# Altium PCB HEAD.PcbDoc
Units mm, origin at the board's own origin, x right, y up, seen from the top; angles counter-clockwise.
Board outline 62.16 x 42.39 mm, 2 copper layers (Top Layer, Bottom Layer); 51 components, 38 nets, 184 pads, 22 vias.
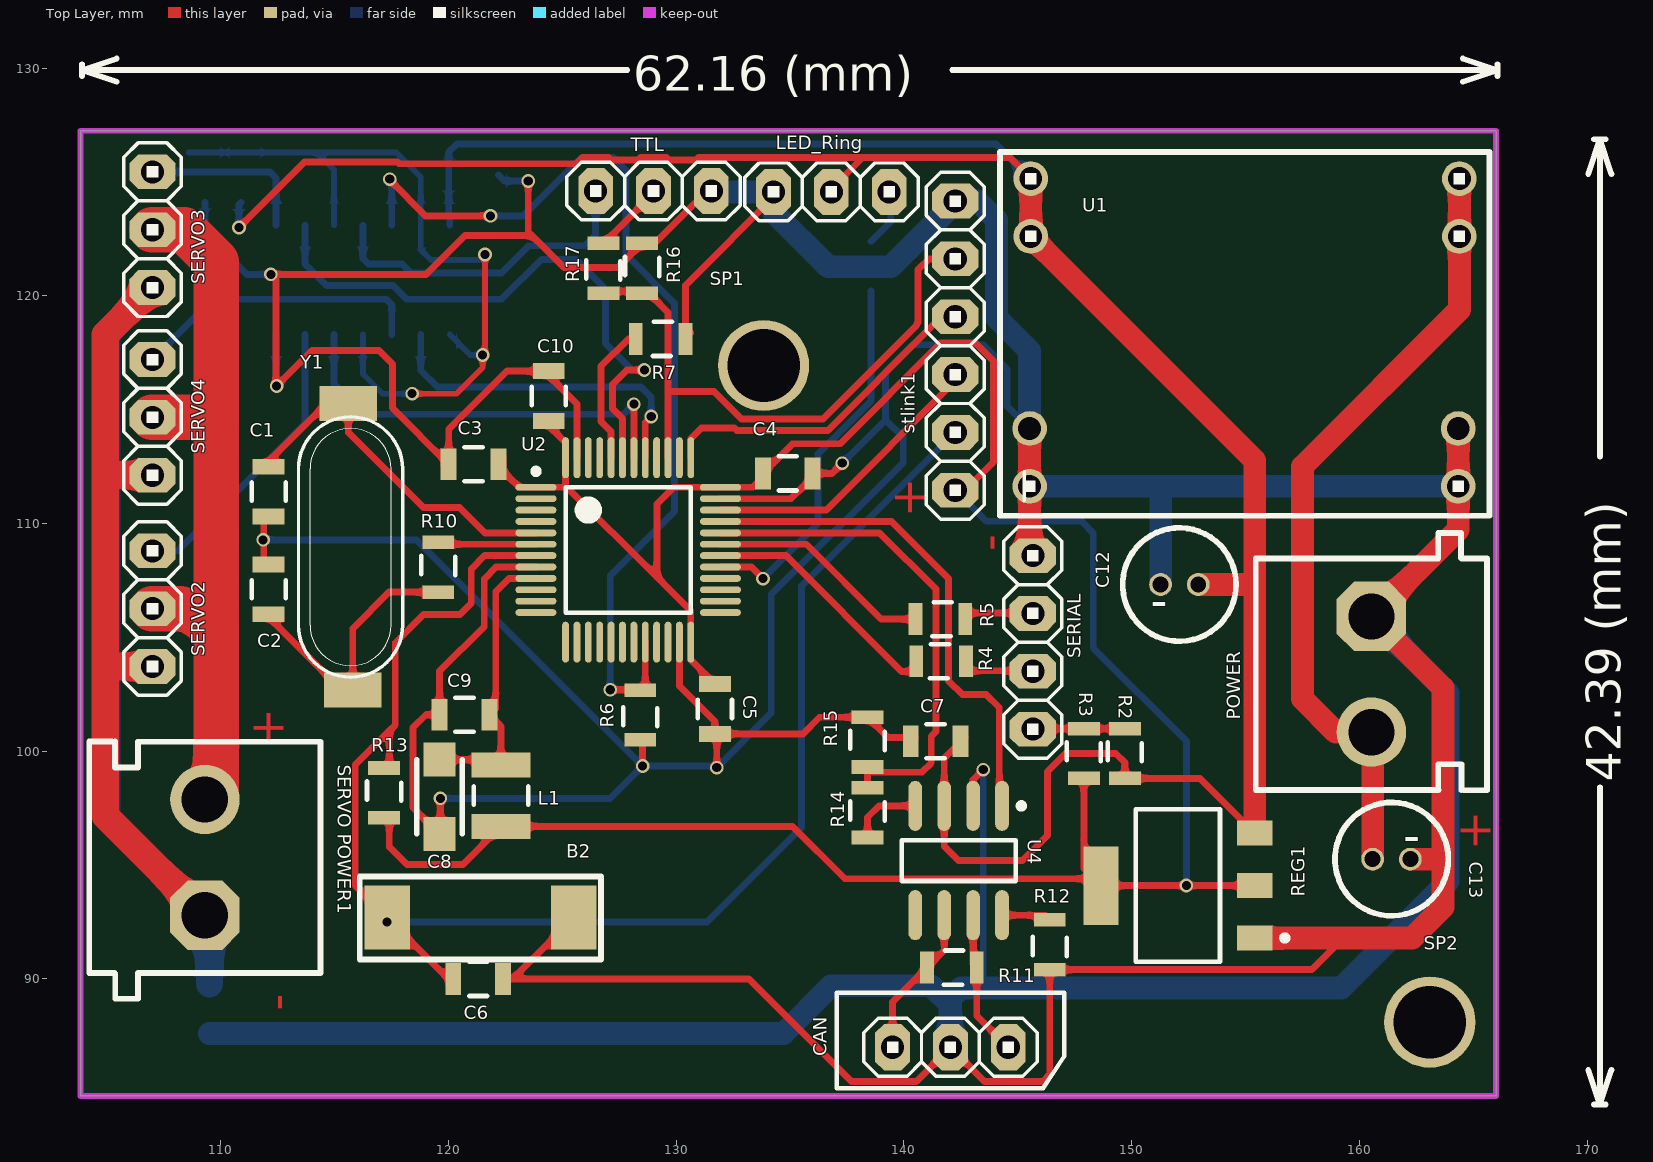
[diagram p0: Top Layer view]
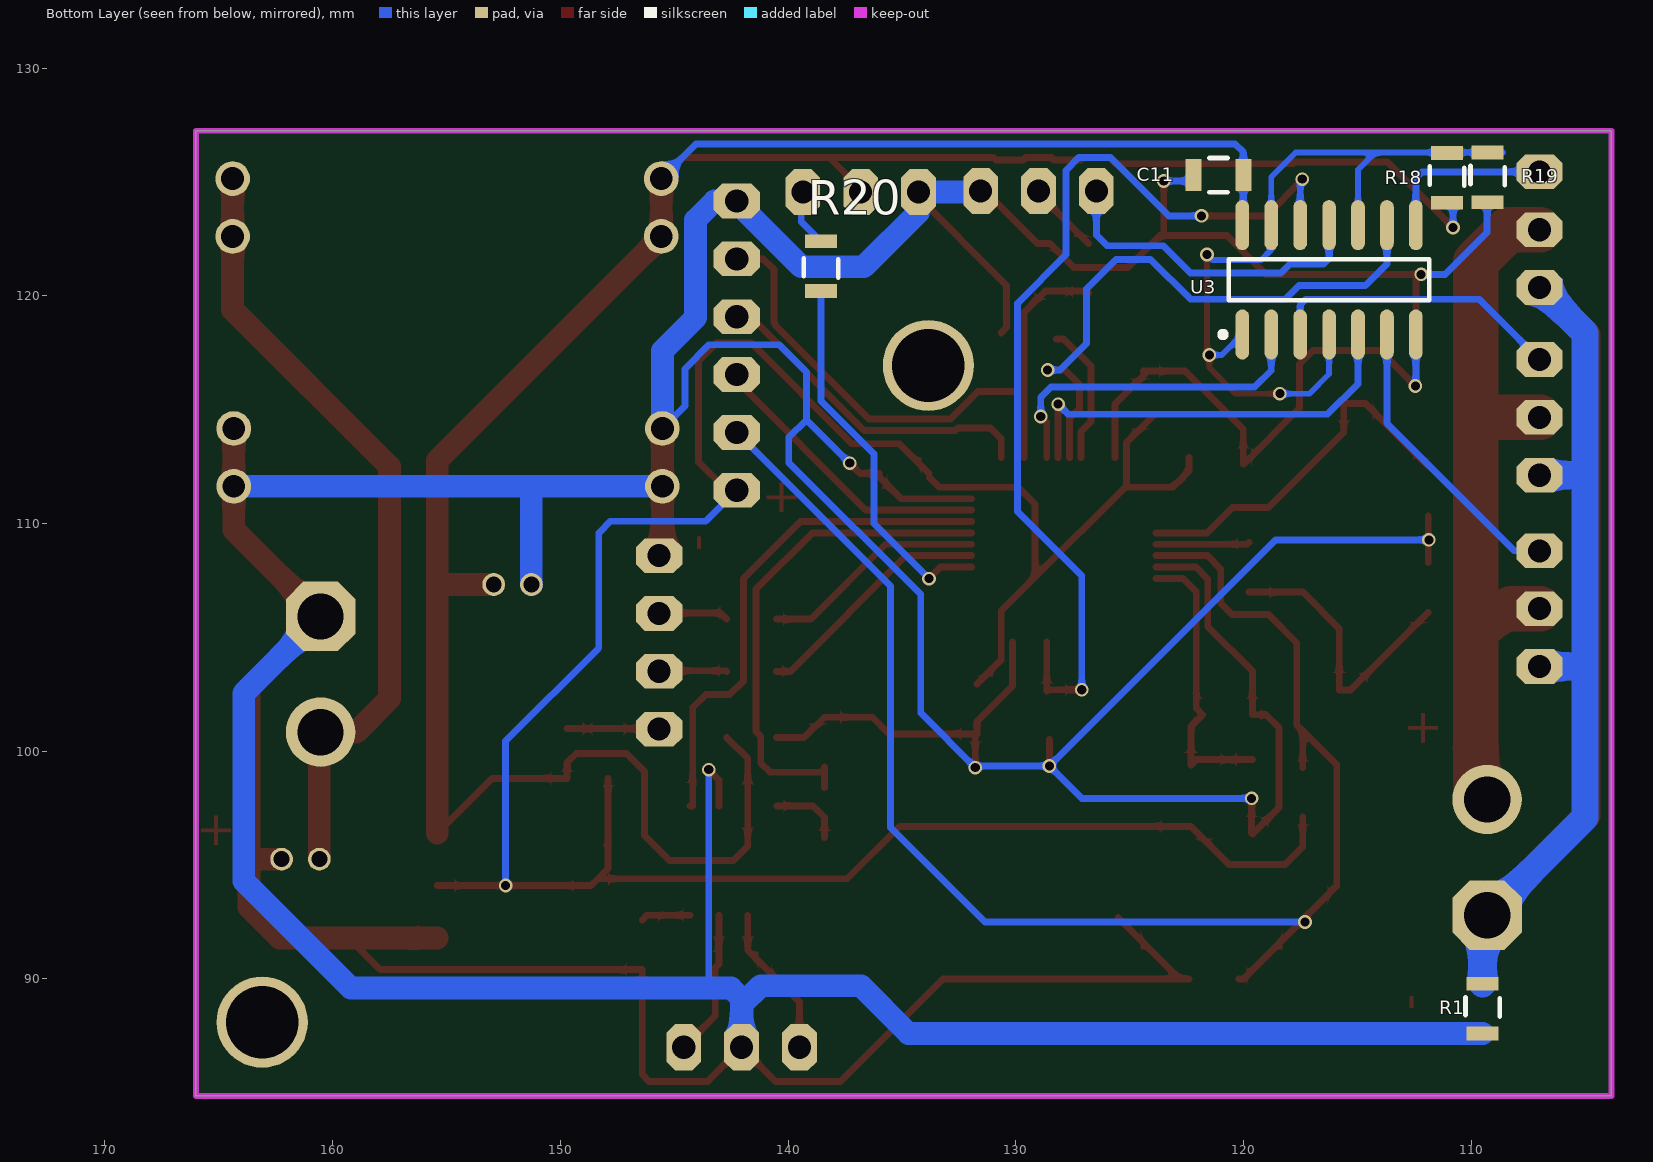
[diagram p1: Bottom Layer view, seen from below]
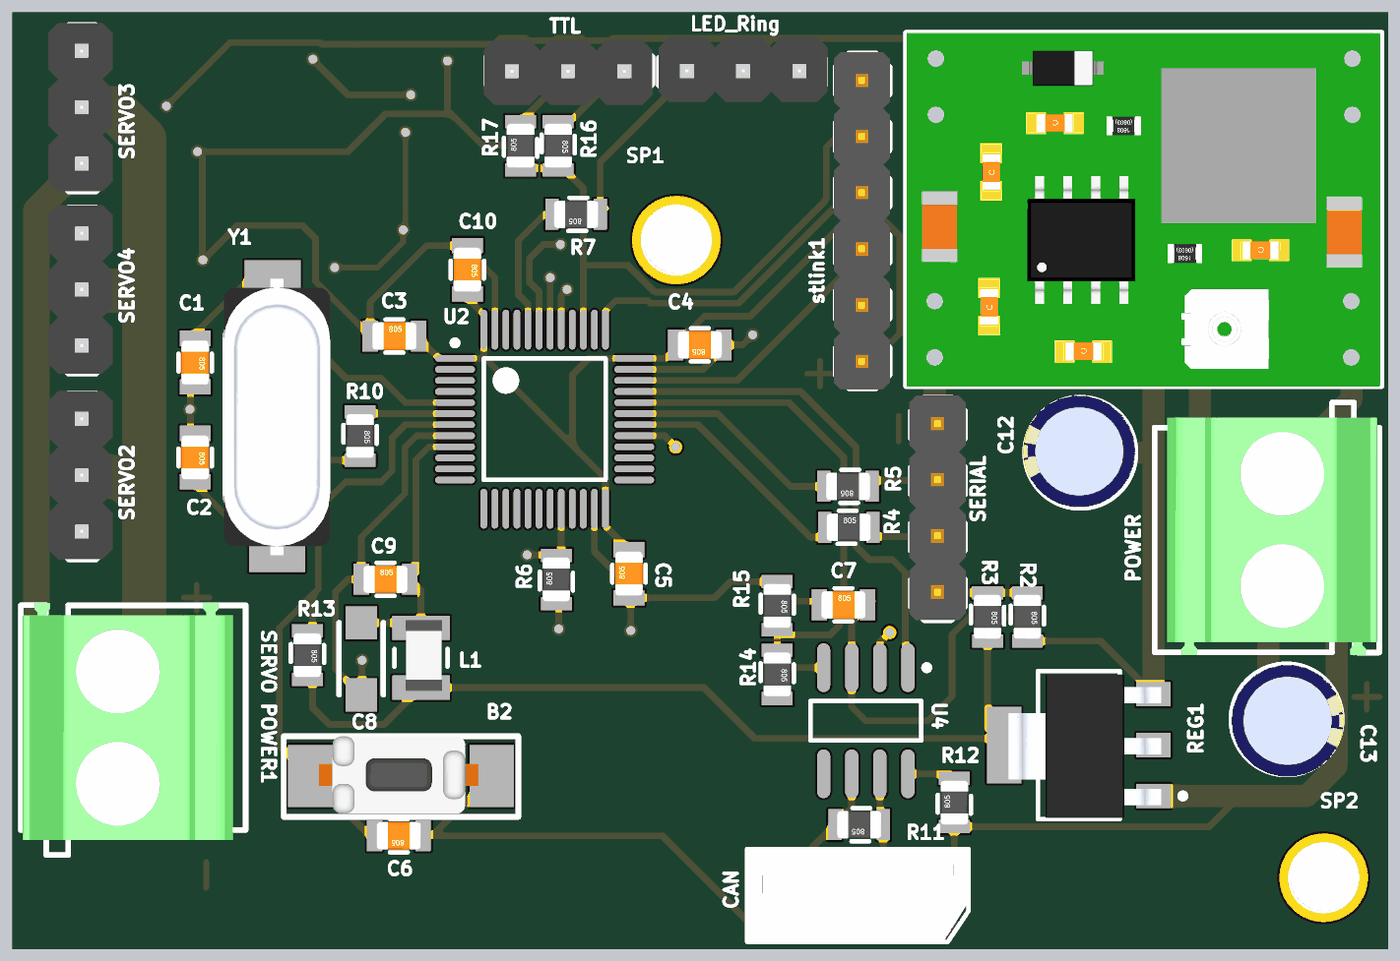
[diagram p2: 3D render of the assembled board from above, using the file's embedded part models]
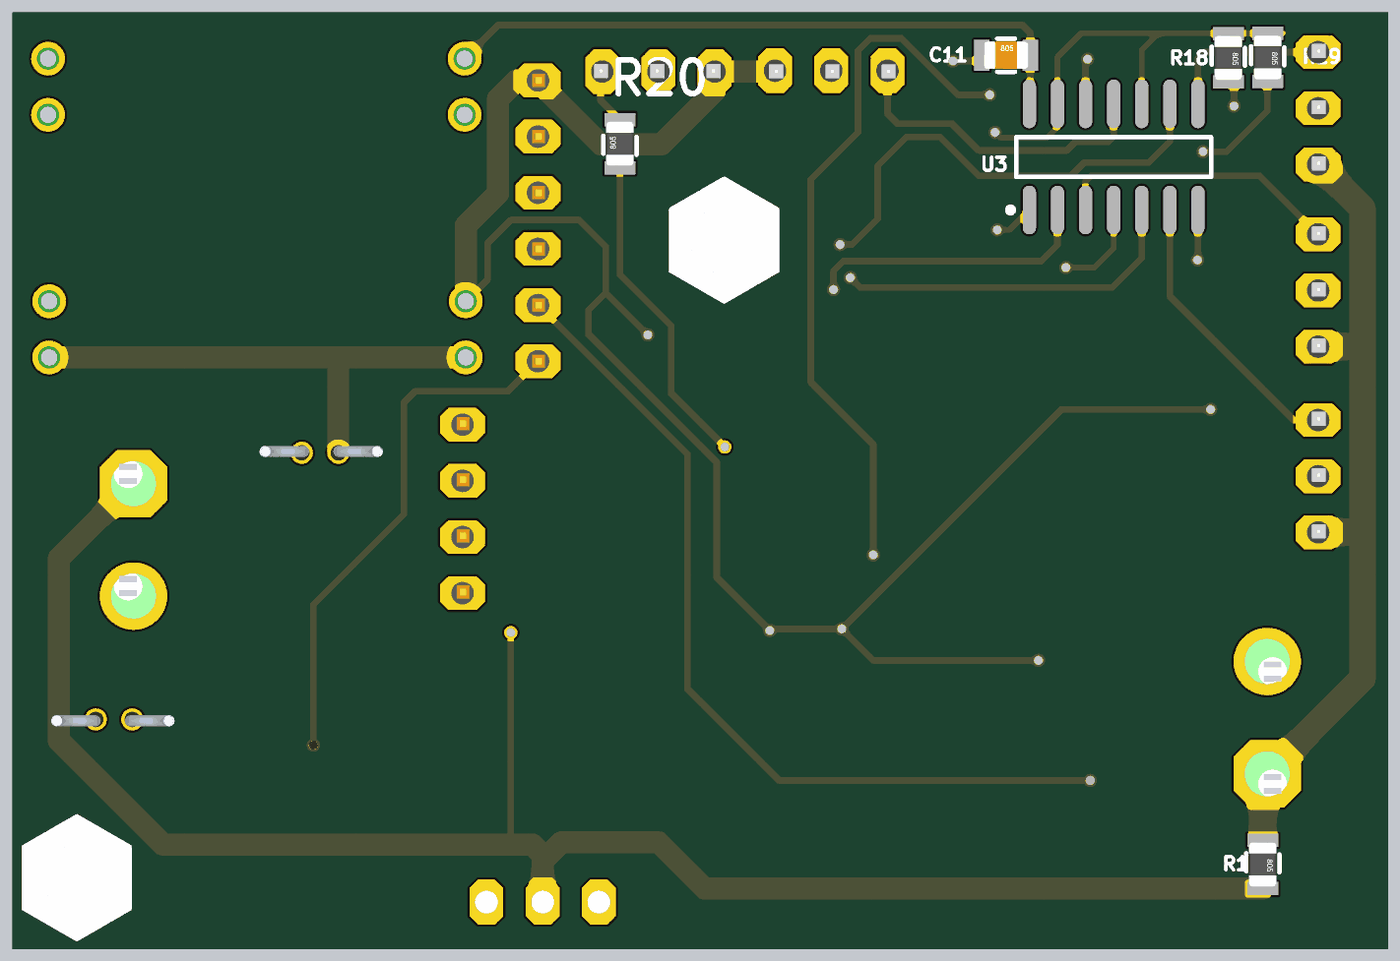
[diagram p3: 3D render of the assembled board from below, using the file's embedded part models]

## Layer stack, top to bottom
Top Solder: solder mask 0.0102, Solder Resist, Dk 3.5
Top Layer: signal copper 0.0356
Dielectric 1: dielectric 0.32, FR-4, Dk 4.8
Bottom Layer: signal copper 0.0356
Bottom Solder: solder mask 0.0102, Solder Resist, Dk 3.5

## Board outline
103.84,84.86 166,84.86 166,127.25 103.84,127.25

## Design rules (kind name [scope] priority, off if disabled: settings)
Clearance [All] p1: gap=0.2 ignorepadtopadclearanceinfootprint=FALSE
PolygonConnect [All] p1: connectstyle=Relief reliefconductorwidth=0.254 reliefentries=4 polygonreliefangle="90 Angle" airgapwidth=0.254
RoutingVias [All] p1: holewidth=0.711 width=1.27 viastyle="Through Hole" minholewidth=0.711 minwidth=1.27 maxholewidth=0.711 maxwidth=1.27
SolderMaskExpansion [All] p1: expansion=0.102
Width [All] p1: maxlimit=6 minlimit=0.2 preferedwidth=0.254 minimp=50.000000 maximp=50.000000 favimp=50.000000
30 further rules are at their usual default settings.

## Components (designator, comment, footprint, x,y, rotation, side; value= is the part's Value field where it differs from the comment)
B2 "RESET" "SMD PUSH BUTTON" 121.3,92.7 r180 top
C1 "20p" MY_CAP_SMD_0805 112.1,111.4 r270 top
C2 "20p" MY_CAP_SMD_0805 112.1,107.108 r270 top
C3 "100n" MY_CAP_SMD_0805 121.1,112.6 r0 top
C4 "100n" MY_CAP_SMD_0805 134.9,112.2 r180 top
C5 "100n" MY_CAP_SMD_0805 131.699,101.854 r90 top
C6 "22Pf" MY_CAP_SMD_0805 121.3,90 r180 top
C7 "100NF" MY_CAP_SMD_0805 141.39,100.44 r0 top
C8 "10uf" MY_cap_smd10uf 119.6,98 r270 top
C9 "100n" MY_CAP_SMD_0805 120.7,101.6 r0 top
C10 "100n" MY_CAP_SMD_0805 124.4,115.6 r270 top
C11 "100NF" MY_CAP_SMD_0805 121.1,125.3 r180 bottom
C12 "100UF" "MY_CAP_POL 5MM" 152.097,107.32 r180 top value=3300u
C13 "100UF" "MY_CAP_POL 5MM" 161.41,95.26 r0 top value=3300u
CAN "pin_gerd" MY_PINGERD3 142.04,87 r0 top
L1 "100UH" MY_SMD_INDUCTOR 122.3,98.05 r90 top
LED_Ring "Header 3" My_1X03 136.81,124.56 r180 top
POWER "CON2 pin blue" My_CN2 165.621,108.445 r270 top
R1 "0" MY_RES_SMD_0805 109.5,88.7 r270 bottom
R2 "0" MY_RES_SMD_0805 149.7,99.9 r270 top
R3 "0" MY_RES_SMD_0805 147.9,99.9 r270 top
R4 "100" MY_RES_SMD_0805 141.63,103.95 r0 top
R5 "100" MY_RES_SMD_0805 141.6,105.8 r180 top
R6 "100k" MY_RES_SMD_0805 128.42,101.59 r90 top
R7 "10k" MY_RES_SMD_0805 129.313,118.105 r180 top
R10 "220" MY_RES_SMD_0805 119.55,108.08 r270 top
R11 "120" MY_RES_SMD_0805 142.1,90.5 r180 top
R12 "120" MY_RES_SMD_0805 146.4,91.5 r90 top
R13 "10K" MY_RES_SMD_0805 117.17,98.17 r270 top
R14 "1.8K" MY_RES_SMD_0805 138.4,97.3 r270 top
R15 "3.3K" MY_RES_SMD_0805 138.4,100.4 r270 top
R16 "3.3K" MY_RES_SMD_0805 128.5,121.208 r270 top
R17 "1.8k" MY_RES_SMD_0805 126.8,121.208 r90 top
R18 "0" MY_RES_SMD_0805 111.06,125.18 r270 bottom
R19 "0" MY_RES_SMD_0805 109.28,125.2 r270 bottom
R20 "120" MY_RES_SMD_0805 138.55,121.3 r90 bottom
REG1 "LD1117 3.3" MY_LD1117-3.3 151.9,94.1 r90 top
SERIAL "Header 4" My_1X04 145.66,104.78 r90 top
SERVO2 "Header 3" My_1X03 107,106.26 r270 top
SERVO3 "Header 3" My_1X03 107,122.9 r270 top
SERVO4 "Header 3" My_1X03 107,114.66 r270 top
"SERVO POWER1" "CON2 pin blue" My_CN2 104.207,90.273 r90 top
SP1 "SPACER 3x25" "MY_SPACER 3X25MM" 133.84,116.94 r0 top
SP2 "SPACER 3x25" "MY_SPACER 3X25MM" 163.09,88.1 r0 top
stlink1 "Header 6" My_1X06 142.25,117.81 r270 top
TTL "Header 3" My_1X03 129,124.6 r0 top
U1 "MP1584" mp1584 154.953,118.389 r180 top
U2 "STM32F103C8T6" LQFP48_N 127.889,108.839 r0 top
U3 "MC74HC125AD" 751A-02_N 116.24,120.7 r90 bottom
U4 "MCP2551-I/SN" SOIC-SN8_N 142.4,95.2 r270 top
Y1 "8mhz" "My_Crystal - SMD" 115.697,108.966 r90 top

## Footprints (in the part's own frame and the unit in brackets; to place one, negate y for a bottom-side part, rotate by r counter-clockwise, add the part's x,y. Pads: shape width x height; smd on the part's side, far side on the other; paste and mask are expansions set on the pad)
751A-02_N [mm] "SOIC, 14-Leads, Body 8.7x3.9mm, Pitch 1.27mm, IPC Medium Density"
  oval 2.2x0.6 smd: 1(-2.4,3.81) 2(-2.4,2.54) 3(-2.4,1.27) 4(-2.4,0) 5(-2.4,-1.27) 6(-2.4,-2.54) 7(-2.4,-3.81) 8(2.4,-3.81) 9(2.4,-2.54) 10(2.4,-1.27) 11(2.4,0) 12(2.4,1.27) 13(2.4,2.54) 14(2.4,3.81)
  silkscreen extent -2.52,-4.4 0.9,4.79, body extent -1.95,-4.33 1.95,4.33, height 1.75
LQFP48_N [mm] "Thin QFP, 48-Leads, Body 7x7mm, Pitch 0.5mm, IPC Medium Density"
  oval 1.8x0.3 smd: 1(-4.05,2.75) 2(-4.05,2.25) 3(-4.05,1.75) 4(-4.05,1.25) 5(-4.05,0.75) 6(-4.05,0.25) 7(-4.05,-0.25) 8(-4.05,-0.75) 9(-4.05,-1.25) 10(-4.05,-1.75) 11(-4.05,-2.25) 12(-4.05,-2.75) 25(4.05,-2.75) 26(4.05,-2.25) 27(4.05,-1.75) 28(4.05,-1.25) 29(4.05,-0.75) 30(4.05,-0.25) 31(4.05,0.25) 32(4.05,0.75) 33(4.05,1.25) 34(4.05,1.75) 35(4.05,2.25) 36(4.05,2.75)
  oval 0.3x1.8 smd: 13(-2.75,-4.05) 14(-2.25,-4.05) 15(-1.75,-4.05) 16(-1.25,-4.05) 17(-0.75,-4.05) 18(-0.25,-4.05) 19(0.25,-4.05) 20(0.75,-4.05) 21(1.25,-4.05) 22(1.75,-4.05) 23(2.25,-4.05) 24(2.75,-4.05) 37(2.75,4.05) 38(2.25,4.05) 39(1.75,4.05) 40(1.25,4.05) 41(0.75,4.05) 42(0.25,4.05) 43(-0.25,4.05) 44(-0.75,4.05) 45(-1.25,4.05) 46(-1.75,4.05) 47(-2.25,4.05) 48(-2.75,4.05)
  silkscreen extent -4.17,-2.75 2.75,3.57, body extent -3.5,-3.5 3.5,3.5, height 1.6
mp1584 [mil]
  round 60 hole 39.37: 1(-369.5,266) 1(-369.5,166) 2(-371.5,-166) 2(-371.5,-266) 3(369.5,-166) 3(369.5,-266) 4(371.5,266) 4(371.5,166)
  silkscreen extent -423,-312 423,317, body extent -421,-312 421,318, height 94
My_1X03 [mil]
  oct 60x80 hole 40: 1(-100,0) 2(0,0) 3(100,0)
  silkscreen extent -150,-50 150,50, body extent -152,-61 148,54, height 335
My_1X04 [mil]
  oct 60x80 hole 40: 1(-150,0) 2(-50,0) 3(50,0) 4(150,0)
  silkscreen extent -200,-50 200,50, body extent -198,-49 202,51, height 234
My_1X06 [mil]
  oct 60x80 hole 40: 1(-250,0) 2(-150,0) 3(-50,0) 4(50,0) 5(150,0) 6(250,0)
  silkscreen extent -300,-50 300,50, body extent -300,-51 300,49, height 234
"MY_CAP_POL 5MM" [mm]
  round 1 hole 0.7: +(-0.827,0) -(0.827,0)
  silkscreen extent -2.49,-2.49 2.49,2.49, body extent -2.74,-2.6 2.84,2.48, height 11.7
MY_cap_smd10uf [mm]
  rect 1.5x1.42 smd: +(-1.63,0) -(1.63,0)
  silkscreen extent -1.63,-1 1.62,1, body extent -1.63,-1 1.57,0.9, height 1.9
MY_CAP_SMD_0805 [mm]
  rect 0.7x1.4 smd: 1(-1.092,0) 2(1.092,0)
  silkscreen extent -0.4,-0.75 0.4,0.75, body extent -1,-0.62 1,0.63, height 0.78
My_CN2 [mil]
  oct 120x120 hole 80: 1(99.5,-200.5)
  round 120 hole 80: 2(299.5,-200.5)
  silkscreen extent -45,-400 400,0, body extent -18,-378 404,-4, height 98
"My_Crystal - SMD" [mm]
  rect 1.524x2.54 smd: 1(-6.275,-0.1) 2(6.3,0.1)
  silkscreen extent -5.71,-2.29 5.71,2.29, body extent -6.28,-2.5 6.22,2.3, height 3.92
MY_LD1117-3.3 [mm]
  rect 1.1x1.55 smd: 1(-2.3,-3.502) 2(0,-3.502) 3(2.3,-3.502)
  rect 3.45x1.55 smd: 4(0,3.248)
  silkscreen extent -3.35,-4.95 3.35,1.72, body extent -3.3,-3.85 3.2,3.05, height 1.6
MY_PINGERD3 [mil]
  oct 60x80 hole 40: 1(-100,0) 2(0,0) 3(100,0)
  silkscreen extent -197,-71 197,94, body extent -198,-71 198,95, height 243
MY_RES_SMD_0805 [mm]
  rect 0.6x1.4 smd: 1(-1.092,0) 2(1.092,0)
  silkscreen extent -0.5,-0.75 0.35,0.75, body extent -1,-0.62 1,0.63, height 0.78
MY_SMD_INDUCTOR [mm]
  rect 1.1x2.6 smd: 1(-1.35,0) 2(1.35,0)
  silkscreen extent -0.4,-1.2 0.4,1.2, body extent -1.5,-0.96 1.7,0.7, height 0.53
"MY_SPACER 3X25MM" [mm]
  round 4 hole 3.2: 0(0,0)
  body extent -2.5,-2.89 2.5,2.89, height 6.5
"SMD PUSH BUTTON" [mm]
  rect 2x2.8 smd: 1(-4.2,0) 2(4,0)
  silkscreen extent -5.4,-1.8 5.2,1.85, body extent -3.6,-1.8 3.6,1.7, height 5
SOIC-SN8_N [mm] "SOIC, 8-Leads, Body 4.9x3.8mm, Pitch 1.27mm, IPC Medium Density"
  oval 2.2x0.6 smd: 1(-2.4,1.905) 2(-2.4,0.635) 3(-2.4,-0.635) 4(-2.4,-1.905) 5(2.4,-1.905) 6(2.4,-0.635) 7(2.4,0.635) 8(2.4,1.905)
  silkscreen extent -2.52,-2.5 0.9,2.88, body extent -2,-2.5 2,2.5, height 1.75

## Part data
B2: library part SMD_PUSH_BUTTON
C1 C2 C3 C4 C5 C6 C9 C10: library part "CAP SMD"
C7 C11: library part "CAP SMD_0805", "2.0 mm × 1.25 mm"
C8: library part cap_smd_10u
C12 C13: library part "Cap Pol_5mm", "CAP-3300Uf"
CAN: "3pin"
L1: library part "INDUCTOR SMD"
LED_Ring SERVO2 SERVO3 SERVO4 TTL: "Header, 3-Pin", LatestRevisionDate=17-Jul-2002, LatestRevisionNote="Re-released for DXP Platform.", Publisher="Altium Limited"
POWER "SERVO POWER1": "Connector blue screw"
R1 R6 R7 R10 R13 R18 R19: library part "RES SMD"
R2 R3 R4 R5 R11 R12 R14 R15 R16 R17 R20: library part "RES SMD 0805"
SERIAL: "Header, 4-Pin", LatestRevisionDate=17-Jul-2002, LatestRevisionNote="Re-released for DXP Platform.", Publisher="Altium Limited"
SP1 SP2: "SACER 3MM"
stlink1: "Header, 6-Pin", LatestRevisionDate=17-Jul-2002, LatestRevisionNote="Re-released for DXP Platform.", Publisher="Altium Limited"
U1: "SWITCHING REGULATOR MODULE"
U2: "STM32 ARM-based 32-bit MCU with 64 Kbytes Flash, 48-pin LQFP, Industrial Temperature", ComponentLink1Description="Manufacturer Link", ComponentLink1URL=www.st.com/stm32, ComponentLink2Description=Datasheet, ComponentLink2URL=http://www.st.com/stonline/products/literature/ds/13587.pdf, DatasheetVersion="rev6, Mar-2008", Link=https://www.javanelec.com/Shops?searchFilter=stm32f103#dtl/8649, PackageDescription="48-Pin Low-Profile Quad Flat Pack, 7 x 7 mm Body, 0.5 mm Pitch (LQFP48)", PackageReference=LQFP48, PackageVersion=Mar-2008, Published=30-May-2008, Publisher="Altium Limited"
U3: "Quad 3-State Non-Inverting Buffer", Code_IPC=SOIC127P600-14, ComponentLink1Description="Manufacturer Link", ComponentLink1URL=http://www.onsemi.com/site/products/parametrics/0,4446,178,00.html, DatasheetVersion=1989, LatestRevisionDate=13-Apr-2006, LatestRevisionNote="IPC-7351 Footprint Added.", PackageDescription="14-Pin Small Outline Integrated Circuit 1.27 mm Pitch", PackageReference=751A-02, PackageVersion=1991, Published=17-Jul-2002, Publisher="Altium Limited"
U4: "High-Speed CAN Transceiver, 8-Pin SOIC, Industrial Temperature", Code_IPC=SOIC127P600-8, Code_JEDEC=MS-012, ComponentLink1Description="Manufacturer Link", ComponentLink1URL=http://www.microchip.com, ComponentLink2Description=Datasheet, ComponentLink2URL=http://ww1.microchip.com/downloads/en/DeviceDoc/21667E.pdf, ComponentLink3Description="Packaging Specification", ComponentLink3URL=http://ww1.microchip.com/downloads/en/PackagingSpec/00049AW.pdf, DatasheetVersion="revE, Jan-2007", PackageDescription="8-Lead Plastic Small Outline (SN) - Narrow, 3.90mm Body [SOIC]", PackageReference=SOIC-SN8, PackageVersion="revAW, Oct-2008", Published=29-Jan-2009, Publisher="Altium Limited"
Y1: library part CRYSTAL, "Crystal"

## Via types
v1: diameter 0.6, hole 0.4, Top Layer to Bottom Layer, tented both sides, 20 vias
v2: diameter 0.6, hole 0.4, Top Layer to Bottom Layer, 2 vias

## Nets (pads, with @x,y where several pads share a name; then routed paths per layer and width w, separated by ;. In a path a pad name is that pad's centre, name@x,y a point inside that pad or via, vN(x,y) a via of type N, cw(c..) or ccw(c..) an arc to the next point about the centre after c; other vN are vias at no path point)
+3.3: C3.2 C4.2 C5.2 C10.2 L1.1 R3.2 R13.2 REG1.2 REG1.4 stlink1.6 U2.1 U2.24 U2.36 U2.48 | length 116.4
  Top Layer w0.3: R13.2@117.4,97.108 117.4,95.8 118.17,95.03 120.63,95.03 L1.1 135.1,96.7 137.4,94.4 REG1.4@148.352,94.4 ; C3.2@122.392,112.9 122.392,112.308 123.111,111.589 U2.1 125.211,111.589 ; C10.2@124,114.7 125.139,113.561 U2.48 125.139,111.661 125.211,111.589 ; C5.2 130.639,104.006 U2.24 130.639,106.161 129.15,107.65 ; C4.2@133.782,112.014 133.357,111.589 U2.36 129.889,111.589 129.15,110.85 129.15,107.65 ; C4.2 135.108,113.5 137.19,113.5 141.61,117.92 143.15,117.92 143.93,117.14 143.93,112.7 142.69,111.46 stlink1.6 ; R3.2 147.9,94.852 REG1.4@148.352,94.4 ; REG1.2 v1(152.4,94.1) REG1.4 REG1.4@148.352,94.4 ; 125.211,111.589 129.15,107.65
  Bottom Layer w0.3: stlink1.6 143.61,110.1 147.8,110.1 148.31,109.59 148.31,104.54 152.4,100.45 v1(152.4,94.1)
+5: C7.2 C11.2 C12.+ LED_Ring.2 R2.2 R18.2 REG1.3 U1.3 U3.14 U4.3 | length 129.2
  Top Layer w0.3: v1(110.8,123) 113.67,125.87 117.749,125.87 117.819,125.8 125.627,125.8 125.893,126.066 127.027,126.066 127.127,125.966 128.333,125.966 128.433,126.066 129.567,126.066 129.667,125.966 130.873,125.966 130.973,126.066 138.19,126.066 ; LED_Ring.2 136.81,124.686 138.19,126.066 ; C7.2@142.692,100.6 141.765,99.673 U4.3 141.765,95.835 142.4,95.2 145.2,95.2 146.3,96.3 146.3,99.1 147.1,99.9 149.3,99.9 149.7,99.5 R2.2 152.994,98.808 REG1.3 ; U1.3@145.567,125.146 144.647,126.066 138.19,126.066
  Top Layer w1: U1.3@145.567,125.146 145.567,122.606 155.402,112.771 155.402,107.29 ; C12.+ 155.372,107.32 155.402,107.29 ; REG1.3 155.402,107.29
  Bottom Layer w0.3: v1(110.8,123) 110.8,124.008 R18.2@110.9,124.108 ; U3.14 120.05,123.5 120.008,123.542 C11.2 120.008,126.308 120.366,126.666 144.047,126.666 U1.3@145.567,125.146
BOOT0: R7.2 U2.44 | length 6.2
  Top Layer w0.3: U2.44 127.139,114.041 126.7,114.48 126.7,116.91 127.895,118.105 R7.2
CAN_H: CAN.3 R11.1 U4.7 | length 6.4
  Top Layer w0.3: U4.7 143.035,90.657 R11.1 143.192,88.388 CAN.3
CAN_L: CAN.1 R11.2 U4.6 | length 6.7
  Top Layer w0.3: CAN.1 139.5,88.992 R11.2 141.765,91.257 U4.6
CAN_RX: R14.1 R15.2 U2.32 | length 22.2
  Top Layer w0.2: R15.2 R15.2@138.628,99.08
  Top Layer w0.3: U2.32 138.931,109.589 141.4,107.12 141.4,100.86 141.2,100.66 141.2,99.49 140.79,99.08 R15.2@138.628,99.08 ; R14.1 R15.2
CAN_TX: U2.33 U4.1 | length 22.7
  Top Layer w0.3: U2.33 139.451,110.089 141.96,107.58 141.96,103.09 142.56,102.49 143.61,102.49 144.184,101.916 144.184,97.6 U4.1
GND: B2.1 C1.2 C2.1 C3.1 C4.1 C5.1 C6.1 C7.1 C8.- C9.1 C10.1 C11.1 C12.- C13.- CAN.2 LED_Ring.3 POWER.1 R1.2 R6.1 R7.1 R12.1 R15.1 R16.1 R19.2 REG1.1 SERIAL.4 stlink1.1 TTL.3 U1.1 U1.4 U2.8 U2.23 U2.35 U2.47 U3.7 U4.2 | length 399.8
  Top Layer w0.3: C2.1@111.887,108.28 C1.2@111.887,110.338 ; v1(119.64,97.93) 119.64,96.41 C8.- 118.44,97.53 118.44,101.04 119,101.6 C9.1 119.608,103.518 121.57,105.48 121.57,107.57 122.089,108.089 U2.8 ; C6.1 122.8,90 ; v1(123.5,125.04) 123.5,122.81 123.66,122.65 ; C10.1@124.296,116.588 125.639,115.245 U2.47 ; C10.1 122.562,116.692 120.008,114.138 C3.1 117.54,115.068 117.54,117 116.94,117.6 114.01,117.6 v1(112.45,116.04) 112.42,116.07 112.42,120.72 v1(112.2,120.94) 119.01,120.94 120.72,122.65 123.66,122.65 ; B2.1 122.8,90 ; v1(128.524,99.354) R6.1@128.524,100.508 ; U2.23 130.139,102.861 131.699,101.301 C5.1 ; R7.1@130.64,118.366 130.4,118.606 130.4,120.46 LED_Ring.3@134.5,124.56 ; TTL.3@131.54,124.8 129.04,122.3 R16.1 127.44,121.24 125.07,121.24 123.66,122.65 ; v1(131.78,99.28) 131.78,100.681 C5.1 ; U2.35 135.041,111.089 C4.1@135.966,112.014 ; C4.1 136.84,112.2 v1(137.29,112.65) ; C7.1@140.508,100.6 139.292,100.6 R15.1 136.292,101.492 135.562,100.762 C5.1 ; U4.2 143.035,98.745 v2(143.48,99.19) ; 159.3,91.8 157.908,90.408 R12.1 146.4,85.8 146.1,85.5 143.54,85.5 CAN.2 140.54,85.5 137.7,85.5 133.2,90 122.8,90
  Top Layer w1: SERIAL.4@145.5,108.61 145.517,108.627 145.517,111.633 U1.4@145.517,114.173 ; REG1.1 159.3,91.8 162.32,91.8 163.67,93.15 163.67,95.26 ; C13.- 163.67,95.26 ; U1.1@164.338,114.173 164.338,111.633 164.338,109.728 POWER.1 163.67,102.776 163.67,95.26
  Bottom Layer w0.3: R19.2@109.3,124.108 109.3,122.78 111.14,120.94 v1(112.2,120.94) ; v1(111.86,109.28) 118.598,109.28 v1(128.524,99.354) ; U3.7 112.43,116.06 v1(112.45,116.04) ; v1(119.64,97.93) 127.1,97.93 v1(128.524,99.354) ; C11.1 122.452,125.04 v1(123.5,125.04) ; v1(137.29,112.65) 139.19,114.55 ; 143.29,89.6 143.48,89.79 v2(143.48,99.19) ; U1.4@145.517,114.173 144.53,115.16 144.53,116.79 143.47,117.85 140.39,117.85 139.19,116.65 139.19,114.55 ; v1(128.524,99.354) 131.706,99.354 v1(131.78,99.28) 134.17,101.67 134.17,106.88 139.97,112.68 139.97,113.77 139.19,114.55
  Bottom Layer w1: R1.2 134.708,87.608 136.8,89.7 141.2,89.7 142.04,88.86 ; TTL.3 131.58,124.56 LED_Ring.3 134.27,123.67 136.67,121.27 139.418,121.27 142.25,124.102 stlink1.1 143.23,124.16 144.06,123.33 144.06,119.04 145.517,117.583 U1.4@145.517,114.173 ; CAN.2 142.04,88.86 ; U1.4@145.517,111.633 151.28,111.633 ; C12.- 151.28,107.33 151.28,111.633 ; POWER.1 163.9,102.546 163.9,94.3 159.2,89.6 143.29,89.6 142.5,89.6 142.04,89.14 142.04,88.86 ; U1.1@164.338,111.633 151.28,111.633
NetC1_1: C1.1 U2.5 Y1.2 | length 16.2
  Top Layer w0.3: C1.1@111.887,112.522 114.631,115.266 Y1.2 115.597,114.003 118.9,110.7 120.489,110.7 121.6,109.589 U2.5
NetC2_2: C2.2 R10.2 Y1.1 | length 12.6
  Top Layer w0.3: C2.2@111.887,106.096 115.292,102.691 Y1.1 115.797,105.397 117.385,106.985 R10.2@119.761,106.985
NetC8_+: C8.+ C9.2 L1.2 U2.9 | length 12.7
  Top Layer w0.3: C8.+ 122.07,99.63 L1.2 122.3,101.092 C9.2 122.07,101.878 122.07,107 122.659,107.589 U2.9
NetLED_Ring_1: LED_Ring.1 R20.2 | length 2.6
  Bottom Layer w0.3: R20.2 139.42,123.262 139.42,124.49 LED_Ring.1
NetR2_1: R2.1 R3.1 SERIAL.1 | length 4.2
  Top Layer w0.3: SERIAL.1@145.5,100.99 145.502,100.992 R3.1 R2.1
NetR4_2: R4.2 SERIAL.2 | length 2.8
  Top Layer w0.3: R4.2@142.692,103.5 142.722,103.53 SERIAL.2@145.5,103.53
NetR5_1: R5.1 SERIAL.3 | length 2.9
  Top Layer w0.3: R5.1 142.962,106.07 SERIAL.3@145.5,106.07
NetR10_1: R10.1 U2.6 | length 4.1
  Top Layer w0.3: R10.1@119.761,109.169 119.841,109.089 U2.6
NetR12_2: R12.2 U4.8 | length 2.2
  Top Layer w0.3: U4.8 146.192,92.8 R12.2
NetR14_2: R14.2 U4.4 | length 3.2
  Top Layer w0.3: R14.2 138.4,97.1 138.9,97.6 U4.4
NetR17_2: R17.2 TTL.2 | length 3.4
  Top Layer w0.3: R17.2 129,124.5 TTL.2 TTL.2@129,124.8
NetSERVO2_1: SERVO2.1 U3.6 | length 12.9
  Bottom Layer w0.3: SERVO2.1 108.1,108.8 113.7,114.4 U3.6
NetSERVO3_1: SERVO3.1 U3.8 | length 7.6
  Bottom Layer w0.3: SERVO3.1 112.16,125.44 112.43,125.17 U3.8
NetSERVO4_1: SERVO4.1 U3.3 | length 13.8
  Bottom Layer w0.3: SERVO4.1@106.45,116.65 SERVO4.1 109.65,119.85 117.25,119.85 117.51,119.59 U3.3
NetTTL_1: TTL.1 U3.11 | length 14.8
  Bottom Layer w0.3: U3.11 116.24,121.63 116.48,121.39 117.966,121.39 118.36,120.996 122.336,120.996 123.54,122.2 126,122.2 126.46,122.66 TTL.1 TTL.1@126.46,124.8
OUT_ENABLE: R18.1 R19.1 U3.1 U3.4 U3.10 U3.13 | length 35.1
  Top Layer w0.254: v1(118.4,115.7) 120.35,115.7 121.5,116.85 v1(121.5,117.4) 121.6,117.5 v1(121.6,121.81)
  Bottom Layer w0.254: R19.1@108.6,126.292 R19.1 114.208,126.292 ; U3.10 114.97,125.53 114.208,126.292 ; U3.4 116.24,116.56 117.1,115.7 v1(118.4,115.7) ; U3.1 120.95,117.4 v1(121.5,117.4) ; v1(121.6,121.81) 121.363,121.573 119.227,121.573 118.78,122.02 U3.13 118.78,125.22 117.708,126.292 114.208,126.292
PA8: R20.1 U2.29 | length 16.7
  Top Layer w0.3: U2.29 133.301,108.089 v2(133.81,107.58)
  Bottom Layer w0.3: v2(133.81,107.58) 136.23,110 136.23,113.06 138.55,115.38 R20.1
PA9: R4.1 U2.30 | length 10.7
  Top Layer w0.3: U2.30 134.811,108.589 139.9,103.5 R4.1@140.508,103.5
PA10: R5.2 U2.31 | length 9.9
  Top Layer w0.3: U2.31 135.711,109.089 139,105.8 R5.2
PA13: stlink1.4 U2.34 | length 12.9
  Top Layer w0.3: U2.34 136.589,110.589 142.25,116.25 stlink1.4
PA14: stlink1.3 U2.37 | length 14.8
  Top Layer w0.3: U2.37 130.639,113.739 131.1,114.2 132.549,114.2 132.659,114.09 136.654,114.09 141.06,118.496 141.06,118.5 141.64,119.08 stlink1.3
PB2: R6.2 U2.20 U3.12 | length 43
  Top Layer w0.3: v1(117.42,125.12) 117.42,125.08 118.99,123.51 v1(121.84,123.51) ; v1(127.1,102.7) 128.516,102.7 R6.2@128.524,102.692 ; R6.2@128.639,102.639 U2.20
  Bottom Layer w0.3: v1(117.42,125.12) 117.44,125.12 117.51,125.19 U3.12 ; v1(121.84,123.51) 123.278,123.51 125.834,126.066 127.234,126.066 127.8,125.5 127.8,125.433 127.788,125.421 127.788,121.812 129.93,119.67 129.93,110.53 127.1,107.7 v1(127.1,102.7)
PB3: R16.2 R17.1 stlink1.2 U2.39 | length 27.1
  Top Layer w0.3: R17.1 126.892,120.208 128.7,120.208 129.639,119.269 129.639,115.8 ; U2.39 129.639,115.8 ; stlink1.2 141.09,121.62 140.62,121.15 140.62,118.828 140.56,118.768 140.56,118.703 136.447,114.59 132.867,114.59 131.657,115.8 129.639,115.8
RESET: B2.2 C6.2 R13.1 stlink1.5 U2.7 | length 67.7
  Top Layer w0.3: R13.1@117.4,99.292 117.4,100.9 ; C6.2 120,90 B2.2 115.9,94.1 115.9,99.4 117.4,100.9 ; U2.7 121.589,108.589 121,108 121,106.5 120.5,106 118.9,106 117.66,104.76 117.66,101.16 117.4,100.9
  Bottom Layer w0.3: v1(117.3,92.5) 131.35,92.5 135.5,96.65 135.5,107.25 stlink1.5
SERVO_GND: "SERVO POWER1.1" R1.1 SERVO2.3 SERVO3.3 SERVO4.3 | length 71.7
  Top Layer w1.2: SERVO2.3 104.947,103.72 104.927,103.7 ; SERVO4.3 104.947,112.12 104.927,112.1 ; SERVO3.3 104.927,118.287 104.927,112.1 ; 109.3,92.8 104.927,97.173 104.927,103.7 ; 104.927,103.7 104.927,112.1
  Bottom Layer w1.2: SERVO2.3 105.08,103.72 105,103.8 ; SERVO4.3 105.02,112.12 105,112.1 ; SERVO3.3 105,118.36 105,112.1 ; R1.1 109.5,92.6 109.3,92.8 105,97.1 105,103.8 ; 105,103.8 105,112.1
SERVO_SIG1: U2.41 U3.2 | length 14.9
  Top Layer w0.3: U2.41 128.639,114.439 v1(128.9,114.7)
  Bottom Layer w0.3: U3.2 118.78,116.72 119.511,115.989 128.45,115.989 128.889,115.55 128.889,115.511 128.9,115.5 v1(128.9,114.7)
SERVO_SIG2: U2.42 U3.5 | length 18.4
  Top Layer w0.3: U2.42 v1(128.139,115.239)
  Bottom Layer w0.3: U3.5 114.97,116.13 116.3,114.8 127.7,114.8 v1(128.139,115.239)
SERVO_SIG3: U2.43 U3.9 | length 26.4
  Top Layer w0.3: U2.43 127.639,114.601 127.2,115.04 127.2,116.1 127.84,116.74 v1(128.6,116.74)
  Bottom Layer w0.3: U3.9 113.7,121.4 114.65,120.45 117.56,120.45 118.16,119.85 122.33,119.85 124.08,121.6 125.6,121.6 126.9,120.3 126.9,117.9 128.06,116.74 v1(128.6,116.74)
SERVO_VIN: "SERVO POWER1.2" SERVO2.2 SERVO3.2 SERVO4.2 | length 32.5
  Top Layer w1.2: 108.24,106.26 109.3,105.2 ; 108.64,114.66 109.3,114
  Top Layer w2: SERVO2.2 108.24,106.26 ; SERVO4.2 108.64,114.66 ; SERVO3.2 108.4,122.9 109.8,121.5 109.8,98.38 109.3,97.88
VIN: C13.+ POWER.2 U1.2 | length 34.9
  Top Layer w1: C13.+ 160.583,100.783 POWER.2 158.962,100.838 157.5,102.3 157.5,112.5 164.389,119.389 164.389,122.606 U1.2@164.389,125.146
pads on no net: SP1.0 SP2.0 U2.2 U2.3 U2.4 U2.10 U2.11 U2.12 U2.13 U2.14 U2.15 U2.16 U2.17 U2.18 U2.19 U2.21 U2.22 U2.25 U2.26 U2.27 U2.28 U2.38 U2.40 U2.45 U2.46 U4.5

## Keep-outs
Keep-Out Layer:
  the board outline again, w0.254

## Other copper
Top Layer:
  text "+" at 140.93,112.01 h1.52 r90
  text "-" at 144.48,109.52 h1.52 r90
  text "+" at 112.76,101.88 h1.52 r90
  text "+" at 164.45,97.39 h1.52 r270
  text "-" at 113.19,89.34 h1.52 r90

## Silkscreen, mask and mechanical layers (free items; w line width, h text height)
Top Overlay:
  lines w0.254: 103.905,129.656 103.905,130.164 ; 105.429,129.402 103.905,129.91 ; 105.429,130.418 103.905,129.91 ; 127.85,129.91 103.905,129.91 ; 142.12,129.91 166.065,129.91 ; 164.541,129.402 166.065,129.91 ; 164.541,130.418 166.065,129.91 ; 166.065,129.656 166.065,130.164 ; 170.052,86.007 170.56,84.483 ; 170.052,125.349 170.56,126.873 ; 170.306,84.483 170.814,84.483 ; 170.306,126.873 170.814,126.873 ; 170.56,98.416 170.56,84.483 ; 170.56,112.94 170.56,126.873 ; 171.068,86.007 170.56,84.483 ; 171.068,125.349 170.56,126.873
  text "62.16 (mm)" at 128.104,128.996 h1.52
  text "42.39 (mm)" at 171.474,98.67 h1.52 r90

## Text inside footprints (layer, text, board x,y; h text height)
C12: Top Overlay "-" at 151.59,107.026 h1.52 r180
C13: Top Overlay "-" at 161.917,95.554 h1.52